# Altium PCB ADS1274.PcbDoc (part 2 of 2)
Units mil, origin at the board's own origin, x right, y up, seen from the top; angles counter-clockwise.
Board outline 3553.34 x 2765.94 mil, 2 copper layers (Top Layer, Bottom Layer); 108 components, 70 nets, 358 pads, 1184 vias.
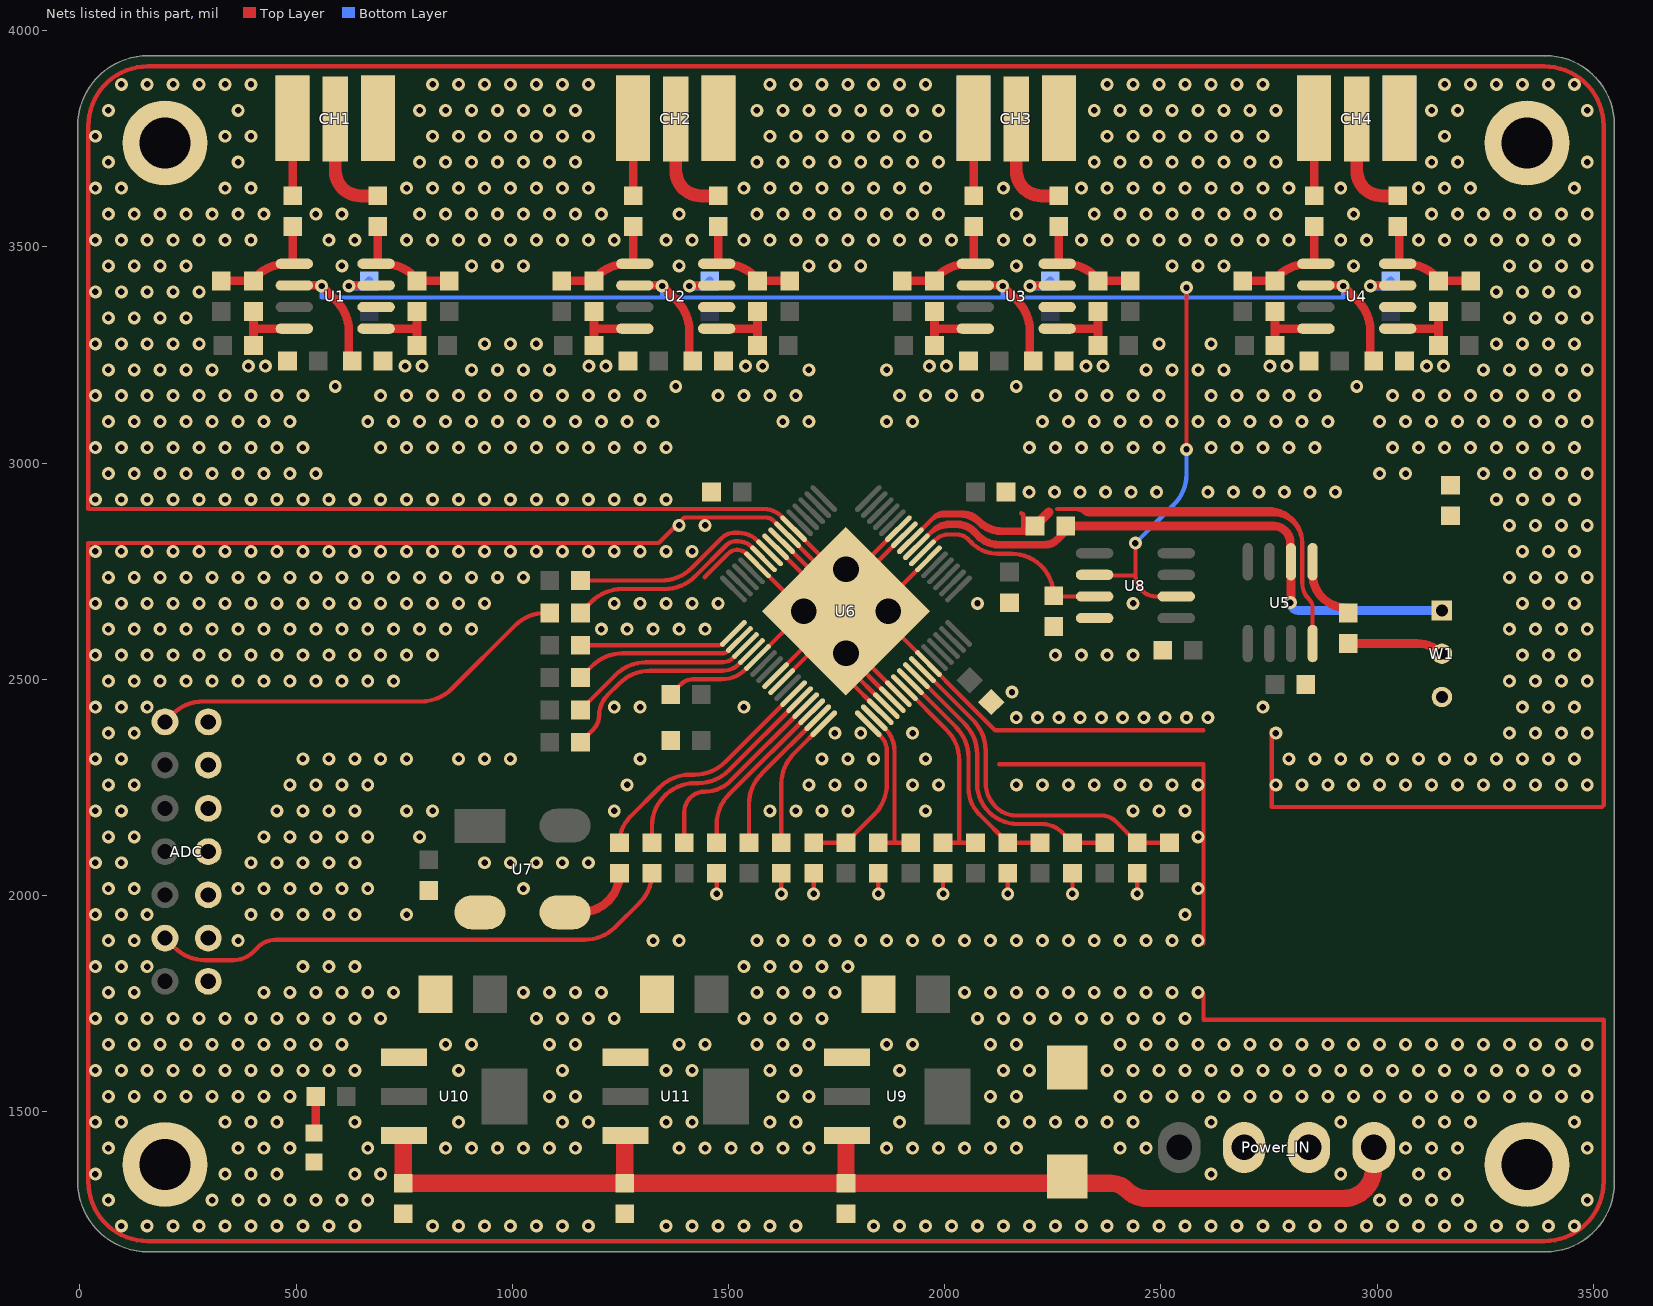
[diagram p2: the nets of this part, all layers, seen from the top]

## Via types
v1: diameter 30, hole 15, Top Layer to Bottom Layer, tented both sides, 1175 vias
v2: diameter 50, hole 28, Top Layer to Bottom Layer, tented both sides, 9 vias

## Nets (pads, with @x,y where several pads share a name; then routed paths per layer and width w, separated by ;. In a path a pad name is that pad's centre, name@x,y a point inside that pad or via, vN(x,y) a via of type N, cw(c..) or ccw(c..) an arc to the next point about the centre after c; other vN are vias at no path point) (continued)
GND: ADC.2 ADC.4 ADC.6 ADC.8 ADC.10 ADC.12 ADC.14 C12.1 C13.1 C14.1 C15.1 C16.2 C17.2 C18.2 C19.2 C20.1 C21.1 C22.1 C23.1 C24.1 C25.1 C26.1 C27.1 C28.1 C29.1 C30.1 C31.1 C32.1 C33.1 C34.1 C35.1 CH1.2 CH2.2 CH3.2 CH4.2 pad.0 pad.1 pad.2 pad.3 pad.4 Power.2 Power_IN.2 Power_IN.3 R3.1 R10.1 R17.1 R24.1 R39.2 R41.2 R42.2 R44.2 R45.1 R46.1 R47.1 R48.1 R53.1 U1.6 U2.6 U3.6 U4.6 U6.6 U6.7 U6.8 U6.9 U6.12 U6.21 U6.24 U6.25 U6.35 U6.36 U6.37 U6.38 U6.43 U6.54 U6.58 U6.59 U6.65 U7.2 U8.4 U9.1 U10.1 U11.1 | length 22861.8
  Top Layer w10: C20.1@1366.14,2464.57 1390.44,2488.86 cw(c1417.32,2461.98) 1417.32,2500 1484.25,2500 ccw(c1484.25,2578.43) 1539.71,2522.97 U6.21@1567.04,2550.3 pad.0@1674.22,2657.48 U6.12@1567.04,2764.66 1541.54,2790.16 ccw(c1519.68,2768.31) 1519.68,2799.21 ccw(c1519.68,2770.7) 1499.52,2790.86 1444.88,2736.22 ; v1(1472.44,2003.94) R44.2@1472.44,2051.18 ; U6.24@1608.8,2508.54 1757.73,2657.48 U6.9@1608.8,2806.42 ; v1(1622.05,2003.94) R42.2@1622.05,2051.18 ; U6.25@1622.72,2494.62 U6.65@1771.65,2643.56 ; U6.8@1622.72,2820.34 U6.65@1771.65,2671.4 ; v1(1696.85,2003.94) R41.2@1696.85,2051.18 ; U6.65@1771.65,2504.37 U6.35@1850.99,2425.03 ; pad.0@1771.65,2532.21 U6.36@1864.91,2438.95 ; pad.0@1771.65,2560.04 U6.37@1878.83,2452.86 ; pad.0@1771.65,2587.88 U6.38@1892.75,2466.78 ; v1(1846.46,2003.94) R39.2@1846.46,2051.18 ; U6.59@1892.75,2848.18 pad.0@1771.65,2727.08 ; U6.58@1906.67,2834.26 U6.65@1771.65,2699.24 ; U6.54@1962.35,2778.58 pad.0@1841.25,2657.48 ; v1(1996.06,2003.94) R53.1@1996.06,2051.18 ; 2041.82,2456.91 U6.43@1962.35,2536.38 pad.0@1841.25,2657.48 ; 2041.83,2456.9 2116.84,2381.89 2598.43,2381.89 ; C23.1@2101.69,2444.88 ccw(c2101.69,2453.43) C23.1@2107.73,2447.39 ; 2125.98,2303.15 2598.43,2303.15 v1@2598.43,1889.76 ; v1(2145.67,2003.94) R48.1@2145.67,2051.18 ; v1(2295.28,2003.94) R47.1@2295.28,2051.18 ; v1(2444.88,2003.94) R46.1@2444.88,2051.18 ; v1@2598.43,1771.65 2598.43,1712.6 3523.62,1712.6 3523.62,1338.58 cw(c3385.83,1338.58) 3385.83,1200.79 157.48,1200.79 cw(c157.48,1338.58) 19.68,1338.58 19.69,2814.96 1338.58,2814.96 1397.64,2874.02 1586.61,2874.02 cw(c1586.61,2849.24) 1604.13,2866.76 U6.7@1636.64,2834.26 U6.65@1771.65,2699.24 ; v1@2755.91,2381.89 2755.91,2204.72 3519.68,2204.72 3523.62,2208.66 3523.62,3779.53 ccw(c3385.83,3779.53) 3385.83,3917.32 157.48,3917.32 ccw(c157.48,3779.53) 19.69,3779.53 19.69,2893.7 1515.75,2893.7 1582.68,2893.7 cw(c1582.68,2839.74) 1620.84,2877.89 U6.6@1650.55,2848.18 pad.0@1771.65,2727.08 ; U6.65@1771.65,2671.4 U6.65@1771.65,2699.24 ; U6.65@1771.65,2671.4 U6.65@1771.65,2657.48 pad.0@1841.25,2657.48 ; U6.65@1771.65,2699.24 pad.0@1771.65,2727.08
  Top Layer w20: R3.1@492.13,3618.11 CH1.2@492.13,3797.24 ; R10.1@1279.53,3618.11 CH2.2@1279.53,3797.24 ; R17.1@2066.93,3618.11 CH3.2@2066.93,3797.24 ; R24.1@2854.33,3618.11 CH4.2@2854.33,3797.24
  other v1: 95.75,1235.75 155.75,1235.75 215.75,1235.75 275.75,1235.75 335.75,1235.75 395.75,1235.75 455.75,1235.75 515.75,1235.75 575.75,1235.75 635.75,1235.75 815.75,1235.75 875.75,1235.75 935.75,1235.75 995.75,1235.75 1055.75,1235.75 1115.75,1235.75 1175.75,1235.75 1355.75,1235.75 1415.75,1235.75 1475.75,1235.75 1535.75,1235.75 1595.75,1235.75 1655.75,1235.75 1835.75,1235.75 1895.75,1235.75 1955.75,1235.75 2015.75,1235.75 2075.75,1235.75 2135.75,1235.75 2195.75,1235.75 2255.75,1235.75 2315.75,1235.75 2375.75,1235.75 2435.75,1235.75 2495.75,1235.75 2555.75,1235.75 2615.75,1235.75 2675.75,1235.75 2735.75,1235.75 2795.75,1235.75 2855.75,1235.75 2915.75,1235.75 2975.75,1235.75 3035.75,1235.75 3095.75,1235.75 3155.75,1235.75 3215.75,1235.75 3275.75,1235.75 3335.75,1235.75 3395.75,1235.75 3455.75,1235.75 65.75,1295.75 305.75,1295.75 365.75,1295.75 425.75,1295.75 485.75,1295.75 545.75,1295.75 605.75,1295.75 665.75,1295.75 3005.75,1295.75 3065.75,1295.75 3125.75,1295.75 3185.75,1295.75 3485.75,1295.75 35.75,1355.75 335.75,1355.75 395.75,1355.75 455.75,1355.75 635.75,1355.75 695.75,1355.75 2615.75,1355.75 2915.75,1355.75 3095.75,1355.75 3155.75,1355.75 65.75,1415.75 365.75,1415.75 425.75,1415.75 485.75,1415.75 665.75,1415.75 845.75,1415.75 905.75,1415.75 965.75,1415.75 1025.75,1415.75 1085.75,1415.75 1145.75,1415.75 1385.75,1415.75 1445.75,1415.75 1505.75,1415.75 1565.75,1415.75 1625.75,1415.75 1685.75,1415.75 1865.75,1415.75 1925.75,1415.75 1985.75,1415.75 2045.75,1415.75 2105.75,1415.75 2165.75,1415.75 2405.75,1415.75 2465.75,1415.75 3065.75,1415.75 3125.75,1415.75 3185.75,1415.75 3485.75,1415.75 35.75,1475.75 95.75,1475.75 335.75,1475.75 395.75,1475.75 455.75,1475.75 635.75,1475.75 875.75,1475.75 1115.75,1475.75 1175.75,1475.75 1355.75,1475.75 1415.75,1475.75 1595.75,1475.75 1655.75,1475.75 1895.75,1475.75 2135.75,1475.75 2195.75,1475.75 2255.75,1475.75 2315.75,1475.75 2375.75,1475.75 2435.75,1475.75 2615.75,1475.75 2915.75,1475.75 3095.75,1475.75 3155.75,1475.75 3215.75,1475.75 3455.75,1475.75 65.75,1535.75 125.75,1535.75 185.75,1535.75 245.75,1535.75 305.75,1535.75 365.75,1535.75 425.75,1535.75 485.75,1535.75 1085.75,1535.75 1145.75,1535.75 1625.75,1535.75 1685.75,1535.75 2105.75,1535.75 2165.75,1535.75 2405.75,1535.75 2465.75,1535.75 2525.75,1535.75 2585.75,1535.75 2645.75,1535.75 2705.75,1535.75 2765.75,1535.75 2825.75,1535.75 2885.75,1535.75 2945.75,1535.75 3005.75,1535.75 3065.75,1535.75 3125.75,1535.75 3185.75,1535.75 3245.75,1535.75 3305.75,1535.75 3365.75,1535.75 3425.75,1535.75 3485.75,1535.75 35.75,1595.75 95.75,1595.75 155.75,1595.75 215.75,1595.75 275.75,1595.75 335.75,1595.75 395.75,1595.75 455.75,1595.75 515.75,1595.75 575.75,1595.75 635.75,1595.75 875.75,1595.75 1115.75,1595.75 1355.75,1595.75 1415.75,1595.75 1595.75,1595.75 1655.75,1595.75 1895.75,1595.75 2135.75,1595.75 2195.75,1595.75 2375.75,1595.75 2435.75,1595.75 2495.75,1595.75 2555.75,1595.75 2615.75,1595.75 2675.75,1595.75 2735.75,1595.75 2795.75,1595.75 2855.75,1595.75 2915.75,1595.75 2975.75,1595.75 3035.75,1595.75 3095.75,1595.75 3155.75,1595.75 3215.75,1595.75 3275.75,1595.75 3335.75,1595.75 3395.75,1595.75 3455.75,1595.75 65.75,1655.75 125.75,1655.75 185.75,1655.75 245.75,1655.75 305.75,1655.75 365.75,1655.75 425.75,1655.75 485.75,1655.75 545.75,1655.75 605.75,1655.75 845.75,1655.75 905.75,1655.75 1085.75,1655.75 1145.75,1655.75 1385.75,1655.75 1445.75,1655.75 1565.75,1655.75 1625.75,1655.75 1685.75,1655.75 1865.75,1655.75 1925.75,1655.75 2105.75,1655.75 2165.75,1655.75 2405.75,1655.75 2465.75,1655.75 2525.75,1655.75 2585.75,1655.75 2645.75,1655.75 2705.75,1655.75 2765.75,1655.75 2825.75,1655.75 2885.75,1655.75 2945.75,1655.75 3005.75,1655.75 3065.75,1655.75 3125.75,1655.75 3185.75,1655.75 3245.75,1655.75 3305.75,1655.75 3365.75,1655.75 3425.75,1655.75 3485.75,1655.75 35.75,1715.75 95.75,1715.75 155.75,1715.75 215.75,1715.75 275.75,1715.75 335.75,1715.75 395.75,1715.75 455.75,1715.75 515.75,1715.75 575.75,1715.75 635.75,1715.75 695.75,1715.75 1055.75,1715.75 1115.75,1715.75 1175.75,1715.75 1235.75,1715.75 1535.75,1715.75 1595.75,1715.75 1655.75,1715.75 1715.75,1715.75 2075.75,1715.75 2135.75,1715.75 2195.75,1715.75 2255.75,1715.75 2315.75,1715.75 2375.75,1715.75 2435.75,1715.75 2495.75,1715.75 2555.75,1715.75 65.75,1775.75 125.75,1775.75 425.75,1775.75 485.75,1775.75 545.75,1775.75 605.75,1775.75 665.75,1775.75 725.75,1775.75 1025.75,1775.75 1085.75,1775.75 1145.75,1775.75 1205.75,1775.75 1565.75,1775.75 1625.75,1775.75 1685.75,1775.75 1745.75,1775.75 2045.75,1775.75 2105.75,1775.75 2165.75,1775.75 2225.75,1775.75 2285.75,1775.75 2345.75,1775.75 2405.75,1775.75 2465.75,1775.75 2525.75,1775.75 2585.75,1775.75 35.75,1835.75 95.75,1835.75 155.75,1835.75 515.75,1835.75 575.75,1835.75 635.75,1835.75 1535.75,1835.75 1595.75,1835.75 1655.75,1835.75 1715.75,1835.75 1775.75,1835.75 65.75,1895.75 125.75,1895.75 365.75,1895.75 1325.75,1895.75 1385.75,1895.75 1565.75,1895.75 1625.75,1895.75 1685.75,1895.75 1745.75,1895.75 1805.75,1895.75 1865.75,1895.75 1925.75,1895.75 1985.75,1895.75 2045.75,1895.75 2105.75,1895.75 2165.75,1895.75 2225.75,1895.75 2285.75,1895.75 2345.75,1895.75 2405.75,1895.75 2465.75,1895.75 2525.75,1895.75 2585.75,1895.75 35.75,1955.75 95.75,1955.75 155.75,1955.75 395.75,1955.75 455.75,1955.75 515.75,1955.75 575.75,1955.75 635.75,1955.75 755.75,1955.75 2555.75,1955.75 65.75,2015.75 125.75,2015.75 365.75,2015.75 425.75,2015.75 485.75,2015.75 545.75,2015.75 605.75,2015.75 665.75,2015.75 1025.75,2015.75 2585.75,2015.75 35.75,2075.75 95.75,2075.75 395.75,2075.75 455.75,2075.75 515.75,2075.75 575.75,2075.75 635.75,2075.75 935.75,2075.75 995.75,2075.75 1055.75,2075.75 1115.75,2075.75 1175.75,2075.75 65.75,2135.75 125.75,2135.75 425.75,2135.75 485.75,2135.75 545.75,2135.75 605.75,2135.75 665.75,2135.75 785.75,2135.75 2585.75,2135.75 35.75,2195.75 95.75,2195.75 455.75,2195.75 515.75,2195.75 575.75,2195.75 635.75,2195.75 755.75,2195.75 815.75,2195.75 1235.75,2195.75 1595.75,2195.75 1655.75,2195.75 1715.75,2195.75 1775.75,2195.75 1955.75,2195.75 2435.75,2195.75 2495.75,2195.75 2555.75,2195.75 65.75,2255.75 125.75,2255.75 485.75,2255.75 545.75,2255.75 605.75,2255.75 665.75,2255.75 1265.75,2255.75 1685.75,2255.75 1745.75,2255.75 1805.75,2255.75 1925.75,2255.75 1985.75,2255.75 2165.75,2255.75 2225.75,2255.75 2285.75,2255.75 2345.75,2255.75 2405.75,2255.75 2465.75,2255.75 2525.75,2255.75 2585.75,2255.75 2765.75,2255.75 2825.75,2255.75 2885.75,2255.75 2945.75,2255.75 3005.75,2255.75 3065.75,2255.75 3125.75,2255.75 3185.75,2255.75 3245.75,2255.75 3305.75,2255.75 3365.75,2255.75 3425.75,2255.75 3485.75,2255.75 35.75,2315.75 95.75,2315.75 515.75,2315.75 575.75,2315.75 635.75,2315.75 695.75,2315.75 755.75,2315.75 875.75,2315.75 935.75,2315.75 995.75,2315.75 1295.75,2315.75 1715.75,2315.75 1775.75,2315.75 1835.75,2315.75 1955.75,2315.75 2795.75,2315.75 2855.75,2315.75 2915.75,2315.75 2975.75,2315.75 3035.75,2315.75 3095.75,2315.75 3155.75,2315.75 3215.75,2315.75 3275.75,2315.75 3335.75,2315.75 3395.75,2315.75 3455.75,2315.75 65.75,2375.75 125.75,2375.75 1745.75,2375.75 1805.75,2375.75 1925.75,2375.75 2765.75,2375.75 3305.75,2375.75 3365.75,2375.75 3425.75,2375.75 3485.75,2375.75 2165.35,2411.42 2214.57,2411.42 2263.78,2411.42 2312.99,2411.42 2362.2,2411.42 2411.42,2411.42 2460.63,2411.42 2509.84,2411.42 2559.06,2411.42 2608.27,2411.42 35.75,2435.75 95.75,2435.75 155.75,2435.75 1235.75,2435.75 1295.75,2435.75 1535.75,2435.75 2735.75,2435.75 3335.75,2435.75 3395.75,2435.75 3455.75,2435.75 2155.51,2470.47 65.75,2495.75 125.75,2495.75 185.75,2495.75 245.75,2495.75 305.75,2495.75 365.75,2495.75 425.75,2495.75 485.75,2495.75 545.75,2495.75 605.75,2495.75 665.75,2495.75 725.75,2495.75 3305.75,2495.75 3365.75,2495.75 3425.75,2495.75 3485.75,2495.75 35.75,2555.75 95.75,2555.75 155.75,2555.75 215.75,2555.75 275.75,2555.75 335.75,2555.75 395.75,2555.75 455.75,2555.75 515.75,2555.75 575.75,2555.75 635.75,2555.75 695.75,2555.75 755.75,2555.75 815.75,2555.75 2255.75,2555.75 2315.75,2555.75 2375.75,2555.75 2435.75,2555.75 3335.75,2555.75 3395.75,2555.75 3455.75,2555.75 65.75,2615.75 125.75,2615.75 185.75,2615.75 245.75,2615.75 305.75,2615.75 365.75,2615.75 425.75,2615.75 485.75,2615.75 545.75,2615.75 605.75,2615.75 665.75,2615.75 725.75,2615.75 785.75,2615.75 845.75,2615.75 905.75,2615.75 1205.75,2615.75 1265.75,2615.75 1325.75,2615.75 1385.75,2615.75 1445.75,2615.75 3305.75,2615.75 3365.75,2615.75 3425.75,2615.75 3485.75,2615.75 35.75,2675.75 95.75,2675.75 155.75,2675.75 215.75,2675.75 275.75,2675.75 335.75,2675.75 395.75,2675.75 455.75,2675.75 515.75,2675.75 575.75,2675.75 635.75,2675.75 695.75,2675.75 755.75,2675.75 815.75,2675.75 875.75,2675.75 935.75,2675.75 1235.75,2675.75 1295.75,2675.75 1355.75,2675.75 1415.75,2675.75 1475.75,2675.75 2075.75,2675.75 2435.75,2675.75 3335.75,2675.75 3395.75,2675.75 3455.75,2675.75 65.75,2735.75 125.75,2735.75 185.75,2735.75 245.75,2735.75 305.75,2735.75 365.75,2735.75 425.75,2735.75 485.75,2735.75 545.75,2735.75 605.75,2735.75 665.75,2735.75 725.75,2735.75 785.75,2735.75 845.75,2735.75 905.75,2735.75 965.75,2735.75 1025.75,2735.75 3305.75,2735.75 3365.75,2735.75 3425.75,2735.75 3485.75,2735.75 35.75,2795.75 95.75,2795.75 155.75,2795.75 215.75,2795.75 275.75,2795.75 335.75,2795.75 395.75,2795.75 455.75,2795.75 515.75,2795.75 575.75,2795.75 635.75,2795.75 695.75,2795.75 755.75,2795.75 815.75,2795.75 875.75,2795.75 935.75,2795.75 995.75,2795.75 1055.75,2795.75 1115.75,2795.75 1175.75,2795.75 1235.75,2795.75 1295.75,2795.75 1355.75,2795.75 1415.75,2795.75 3335.75,2795.75 3395.75,2795.75 3455.75,2795.75 1385.75,2855.75 1445.75,2855.75 3305.75,2855.75 3365.75,2855.75 3425.75,2855.75 3485.75,2855.75 35.75,2915.75 95.75,2915.75 155.75,2915.75 215.75,2915.75 275.75,2915.75 335.75,2915.75 395.75,2915.75 455.75,2915.75 515.75,2915.75 575.75,2915.75 635.75,2915.75 695.75,2915.75 755.75,2915.75 815.75,2915.75 875.75,2915.75 935.75,2915.75 995.75,2915.75 1055.75,2915.75 1115.75,2915.75 1175.75,2915.75 1235.75,2915.75 1295.75,2915.75 1355.75,2915.75 3275.75,2915.75 3335.75,2915.75 3395.75,2915.75 3455.75,2915.75 2194.88,2933.07 2253.94,2933.07 2312.99,2933.07 2372.05,2933.07 2431.1,2933.07 2490.16,2933.07 2608.27,2933.07 2667.32,2933.07 2726.38,2933.07 2785.43,2933.07 2844.49,2933.07 2903.54,2933.07 65.75,2975.75 125.75,2975.75 185.75,2975.75 245.75,2975.75 305.75,2975.75 365.75,2975.75 425.75,2975.75 485.75,2975.75 545.75,2975.75 3005.75,2975.75 3065.75,2975.75 3245.75,2975.75 3305.75,2975.75 3365.75,2975.75 3425.75,2975.75 3485.75,2975.75 35.75,3035.75 95.75,3035.75 155.75,3035.75 215.75,3035.75 275.75,3035.75 335.75,3035.75 395.75,3035.75 455.75,3035.75 515.75,3035.75 695.75,3035.75 755.75,3035.75 815.75,3035.75 875.75,3035.75 935.75,3035.75 995.75,3035.75 1055.75,3035.75 1115.75,3035.75 1175.75,3035.75 1235.75,3035.75 1295.75,3035.75 1355.75,3035.75 2195.75,3035.75 2255.75,3035.75 2315.75,3035.75 2375.75,3035.75 2435.75,3035.75 2495.75,3035.75 2615.75,3035.75 2675.75,3035.75 2735.75,3035.75 2795.75,3035.75 2855.75,3035.75 3035.75,3035.75 3095.75,3035.75 3155.75,3035.75 3215.75,3035.75 3275.75,3035.75 3335.75,3035.75 3395.75,3035.75 3455.75,3035.75 65.75,3095.75 125.75,3095.75 185.75,3095.75 245.75,3095.75 305.75,3095.75 365.75,3095.75 425.75,3095.75 485.75,3095.75 665.75,3095.75 725.75,3095.75 785.75,3095.75 845.75,3095.75 905.75,3095.75 965.75,3095.75 1025.75,3095.75 1085.75,3095.75 1145.75,3095.75 1205.75,3095.75 1265.75,3095.75 1325.75,3095.75 1625.75,3095.75 1685.75,3095.75 1865.75,3095.75 1925.75,3095.75 2225.75,3095.75 2285.75,3095.75 2345.75,3095.75 2405.75,3095.75 2465.75,3095.75 2525.75,3095.75 2585.75,3095.75 2645.75,3095.75 2705.75,3095.75 2765.75,3095.75 2825.75,3095.75 2885.75,3095.75 3005.75,3095.75 3065.75,3095.75 3125.75,3095.75 3185.75,3095.75 3245.75,3095.75 3305.75,3095.75 3365.75,3095.75 3425.75,3095.75 3485.75,3095.75 35.75,3155.75 95.75,3155.75 155.75,3155.75 215.75,3155.75 275.75,3155.75 335.75,3155.75 395.75,3155.75 455.75,3155.75 515.75,3155.75 695.75,3155.75 755.75,3155.75 815.75,3155.75 875.75,3155.75 935.75,3155.75 995.75,3155.75 1055.75,3155.75 1115.75,3155.75 1175.75,3155.75 1235.75,3155.75 1295.75,3155.75 1475.75,3155.75 1535.75,3155.75 1595.75,3155.75 1655.75,3155.75 1895.75,3155.75 1955.75,3155.75 2015.75,3155.75 2075.75,3155.75 2255.75,3155.75 2315.75,3155.75 2375.75,3155.75 2435.75,3155.75 2495.75,3155.75 2615.75,3155.75 2675.75,3155.75 2735.75,3155.75 2795.75,3155.75 2855.75,3155.75 3035.75,3155.75 3095.75,3155.75 3155.75,3155.75 3215.75,3155.75 3275.75,3155.75 3335.75,3155.75 3395.75,3155.75 3455.75,3155.75 590.55,3177.17 1377.95,3177.17 2165.35,3177.17 2952.76,3177.17 65.75,3215.75 125.75,3215.75 185.75,3215.75 245.75,3215.75 305.75,3215.75 905.75,3215.75 965.75,3215.75 1025.75,3215.75 1085.75,3215.75 1685.75,3215.75 1865.75,3215.75 2465.75,3215.75 2525.75,3215.75 2585.75,3215.75 2645.75,3215.75 3245.75,3215.75 3305.75,3215.75 3365.75,3215.75 3425.75,3215.75 3485.75,3215.75 389.76,3224.41 429.13,3224.41 751.97,3224.41 791.34,3224.41 1177.17,3224.41 1216.54,3224.41 1539.37,3224.41 1578.74,3224.41 1964.57,3224.41 2003.94,3224.41 2326.77,3224.41 2366.14,3224.41 2751.96,3224.4 2791.33,3224.4 3114.16,3224.4 3153.53,3224.4 35.75,3275.75 95.75,3275.75 155.75,3275.75 215.75,3275.75 275.75,3275.75 935.75,3275.75 995.75,3275.75 1055.75,3275.75 2495.75,3275.75 2615.75,3275.75 3275.75,3275.75 3335.75,3275.75 3395.75,3275.75 3455.75,3275.75 65.75,3335.75 125.75,3335.75 185.75,3335.75 245.75,3335.75 3305.75,3335.75 3365.75,3335.75 3425.75,3335.75 3485.75,3335.75 35.75,3395.75 95.75,3395.75 155.75,3395.75 215.75,3395.75 275.75,3395.75 3275.75,3395.75 3335.75,3395.75 3395.75,3395.75 3455.75,3395.75 65.75,3455.75 125.75,3455.75 185.75,3455.75 245.75,3455.75 605.75,3455.75 905.75,3455.75 965.75,3455.75 1025.75,3455.75 1385.75,3455.75 1685.75,3455.75 1745.75,3455.75 1805.75,3455.75 2165.75,3455.75 2525.75,3455.75 2585.75,3455.75 2645.75,3455.75 2945.75,3455.75 3305.75,3455.75 3365.75,3455.75 3425.75,3455.75 3485.75,3455.75 35.75,3515.75 95.75,3515.75 155.75,3515.75 215.75,3515.75 275.75,3515.75 335.75,3515.75 395.75,3515.75 575.75,3515.75 635.75,3515.75 755.75,3515.75 815.75,3515.75 875.75,3515.75 935.75,3515.75 995.75,3515.75 1055.75,3515.75 1115.75,3515.75 1175.75,3515.75 1235.75,3515.75 1355.75,3515.75 1415.75,3515.75 1535.75,3515.75 1595.75,3515.75 1655.75,3515.75 1715.75,3515.75 1775.75,3515.75 1835.75,3515.75 1895.75,3515.75 1955.75,3515.75 2015.75,3515.75 2135.75,3515.75 2195.75,3515.75 2315.75,3515.75 2375.75,3515.75 2435.75,3515.75 2495.75,3515.75 2555.75,3515.75 2615.75,3515.75 2675.75,3515.75 2735.75,3515.75 2795.75,3515.75 2915.75,3515.75 2975.75,3515.75 3095.75,3515.75 3155.75,3515.75 3215.75,3515.75 3275.75,3515.75 3335.75,3515.75 3395.75,3515.75 3455.75,3515.75 65.75,3575.75 125.75,3575.75 185.75,3575.75 245.75,3575.75 305.75,3575.75 365.75,3575.75 425.75,3575.75 545.75,3575.75 605.75,3575.75 785.75,3575.75 845.75,3575.75 905.75,3575.75 965.75,3575.75 1025.75,3575.75 1085.75,3575.75 1145.75,3575.75 1205.75,3575.75 1385.75,3575.75 1565.75,3575.75 1625.75,3575.75 1685.75,3575.75 1745.75,3575.75 1805.75,3575.75 1865.75,3575.75 1925.75,3575.75 1985.75,3575.75 2165.75,3575.75 2345.75,3575.75 2405.75,3575.75 2465.75,3575.75 2525.75,3575.75 2585.75,3575.75 2645.75,3575.75 2705.75,3575.75 2765.75,3575.75 2945.75,3575.75 3125.75,3575.75 3185.75,3575.75 3245.75,3575.75 3305.75,3575.75 3365.75,3575.75 3425.75,3575.75 3485.75,3575.75 35.75,3635.75 95.75,3635.75 335.75,3635.75 395.75,3635.75 755.75,3635.75 815.75,3635.75 875.75,3635.75 935.75,3635.75 995.75,3635.75 1055.75,3635.75 1115.75,3635.75 1175.75,3635.75 1535.75,3635.75 1595.75,3635.75 1655.75,3635.75 1715.75,3635.75 1775.75,3635.75 1835.75,3635.75 1895.75,3635.75 1955.75,3635.75 2135.75,3635.75 2315.75,3635.75 2375.75,3635.75 2435.75,3635.75 2495.75,3635.75 2555.75,3635.75 2615.75,3635.75 2675.75,3635.75 2735.75,3635.75 2795.75,3635.75 2915.75,3635.75 3095.75,3635.75 3155.75,3635.75 3215.75,3635.75 3455.75,3635.75 65.75,3695.75 365.75,3695.75 785.75,3695.75 845.75,3695.75 905.75,3695.75 965.75,3695.75 1025.75,3695.75 1085.75,3695.75 1145.75,3695.75 1565.75,3695.75 1625.75,3695.75 1685.75,3695.75 1745.75,3695.75 1805.75,3695.75 1865.75,3695.75 1925.75,3695.75 1985.75,3695.75 2345.75,3695.75 2405.75,3695.75 2465.75,3695.75 2525.75,3695.75 2585.75,3695.75 2645.75,3695.75 2705.75,3695.75 2765.75,3695.75 3125.75,3695.75 3185.75,3695.75 3485.75,3695.75 35.75,3755.75 335.75,3755.75 395.75,3755.75 815.75,3755.75 875.75,3755.75 935.75,3755.75 995.75,3755.75 1055.75,3755.75 1115.75,3755.75 1175.75,3755.75 1595.75,3755.75 1655.75,3755.75 1715.75,3755.75 1775.75,3755.75 1835.75,3755.75 1895.75,3755.75 1955.75,3755.75 2375.75,3755.75 2435.75,3755.75 2495.75,3755.75 2555.75,3755.75 2615.75,3755.75 2675.75,3755.75 2735.75,3755.75 3155.75,3755.75 65.75,3815.75 365.75,3815.75 785.75,3815.75 845.75,3815.75 905.75,3815.75 965.75,3815.75 1025.75,3815.75 1085.75,3815.75 1145.75,3815.75 1565.75,3815.75 1625.75,3815.75 1685.75,3815.75 1745.75,3815.75 1805.75,3815.75 1865.75,3815.75 1925.75,3815.75 1985.75,3815.75 2345.75,3815.75 2405.75,3815.75 2465.75,3815.75 2525.75,3815.75 2585.75,3815.75 2645.75,3815.75 2705.75,3815.75 2765.75,3815.75 3125.75,3815.75 3185.75,3815.75 3485.75,3815.75 95.75,3875.75 155.75,3875.75 215.75,3875.75 275.75,3875.75 335.75,3875.75 395.75,3875.75 815.75,3875.75 875.75,3875.75 935.75,3875.75 995.75,3875.75 1055.75,3875.75 1115.75,3875.75 1175.75,3875.75 1595.75,3875.75 1655.75,3875.75 1715.75,3875.75 1775.75,3875.75 1835.75,3875.75 1895.75,3875.75 1955.75,3875.75 2375.75,3875.75 2435.75,3875.75 2495.75,3875.75 2555.75,3875.75 2615.75,3875.75 2675.75,3875.75 2735.75,3875.75 3155.75,3875.75 3215.75,3875.75 3275.75,3875.75 3335.75,3875.75 3395.75,3875.75 3455.75,3875.75
MCLK: R54.2 U6.27 | length 553.8
  Top Layer w10: R54.2@1248.03,2122.05 cw(c1333.57,2122.05) 1273.09,2182.54 1340.79,2250.24 cw(c1411.5,2179.53) 1411.5,2279.53 1421.88,2279.53 ccw(c1421.88,2379.53) 1492.59,2308.82 U6.27@1650.55,2466.78
NetC1_1: C1.1 R1.2 R4.1 U1.8 | length 262.4
  Top Layer w20: U1.8@685.04,3460.83 702.48,3460.83 cw(c702.48,3360.83) 773.19,3431.54 C1.1@779.53,3425.2 ; U1.8@688.98,3464.57 R1.2@688.98,3547.24 ; C1.1@779.53,3421.26 R4.1@854.33,3421.26
NetC1_2: C1.2 R6.1 U1.5 | length 173.3
  Top Layer w20: U1.5@685.04,3310.83 779.33,3310.83 779.53,3311.02 ; R6.1@779.53,3271.65 779.53,3311.02 ; C1.2@779.53,3350.39 779.53,3311.02
NetC2_1: C2.1 R3.2 R5.1 U1.1 | length 253.5
  Top Layer w20: R5.1@326.77,3421.26 C2.1@401.57,3421.26 ; C2.1@407.92,3431.54 cw(c478.63,3360.83) 478.63,3460.83 U1.1@496.06,3460.83 ; U1.1@492.13,3464.57 R3.2@492.13,3547.24
NetC2_2: C2.2 R7.1 U1.4 | length 173.3
  Top Layer w20: R7.1@401.57,3271.65 401.57,3311.02 ; C2.2@401.57,3350.39 401.57,3311.02 ; U1.4@496.06,3310.83 401.77,3310.83 401.57,3311.02
NetC3_1: C3.1 R8.2 R11.1 U2.8 | length 262.4
  Top Layer w20: U2.8@1472.44,3460.83 1489.88,3460.83 cw(c1489.88,3360.83) 1560.59,3431.54 C3.1@1566.93,3425.2 ; U2.8@1476.38,3464.57 R8.2@1476.38,3547.24 ; C3.1@1566.93,3421.26 R11.1@1641.73,3421.26
NetC3_2: C3.2 R13.1 U2.5 | length 173.3
  Top Layer w20: U2.5@1472.44,3310.83 1566.73,3310.83 1566.93,3311.02 ; R13.1@1566.93,3271.65 1566.93,3311.02 ; C3.2@1566.93,3350.39 1566.93,3311.02
NetC4_1: C4.1 R10.2 R12.1 U2.1 | length 253.5
  Top Layer w20: R12.1@1114.17,3421.26 C4.1@1188.98,3421.26 ; C4.1@1195.32,3431.54 cw(c1266.03,3360.83) 1266.03,3460.83 U2.1@1283.46,3460.83 ; U2.1@1279.53,3464.57 R10.2@1279.53,3547.24
NetC4_2: C4.2 R14.1 U2.4 | length 173.3
  Top Layer w20: R14.1@1188.98,3271.65 1188.98,3311.02 ; C4.2@1188.98,3350.39 1188.98,3311.02 ; U2.4@1283.46,3310.83 1189.17,3310.83 1188.98,3311.02
NetC5_1: C5.1 R15.2 R18.1 U3.8 | length 262.4
  Top Layer w20: U3.8@2259.84,3460.83 2277.28,3460.83 cw(c2277.28,3360.83) 2347.99,3431.54 C5.1@2354.33,3425.2 ; U3.8@2263.78,3464.57 R15.2@2263.78,3547.24 ; C5.1@2354.33,3421.26 R18.1@2429.13,3421.26
NetC5_2: C5.2 R20.1 U3.5 | length 173.3
  Top Layer w20: U3.5@2259.84,3310.83 2354.13,3310.83 2354.33,3311.02 ; R20.1@2354.33,3271.65 2354.33,3311.02 ; C5.2@2354.33,3350.39 2354.33,3311.02
NetC6_1: C6.1 R17.2 R19.1 U3.1 | length 253.5
  Top Layer w20: R19.1@1901.57,3421.26 C6.1@1976.38,3421.26 ; C6.1@1982.72,3431.54 cw(c2053.43,3360.83) 2053.43,3460.83 U3.1@2070.87,3460.83 ; U3.1@2066.93,3464.57 R17.2@2066.93,3547.24
NetC6_2: C6.2 R21.1 U3.4 | length 173.3
  Top Layer w20: R21.1@1976.38,3271.65 1976.38,3311.02 ; C6.2@1976.38,3350.39 1976.38,3311.02 ; U3.4@2070.87,3310.83 1976.58,3310.83 1976.38,3311.02
NetC7_1: C7.1 R22.2 R25.1 U4.8 | length 262.4
  Top Layer w20: U4.8@3047.24,3460.83 3064.68,3460.83 cw(c3064.68,3360.83) 3135.39,3431.54 C7.1@3141.73,3425.2 ; U4.8@3051.18,3464.57 R22.2@3051.18,3547.24 ; C7.1@3141.73,3421.26 R25.1@3216.54,3421.26
NetC7_2: C7.2 R27.1 U4.5 | length 173.3
  Top Layer w20: U4.5@3047.24,3310.83 3141.54,3310.83 3141.73,3311.02 ; R27.1@3141.73,3271.65 3141.73,3311.02 ; C7.2@3141.73,3350.39 3141.73,3311.02
NetC8_1: C8.1 R24.2 R26.1 U4.1 | length 253.5
  Top Layer w20: R26.1@2688.98,3421.26 C8.1@2763.78,3421.26 ; C8.1@2770.12,3431.54 cw(c2840.83,3360.83) 2840.83,3460.83 U4.1@2858.27,3460.83 ; U4.1@2854.33,3464.57 R24.2@2854.33,3547.24
NetC8_2: C8.2 R28.1 U4.4 | length 173.3
  Top Layer w20: R28.1@2763.78,3271.65 2763.78,3311.02 ; C8.2@2763.78,3350.39 2763.78,3311.02 ; U4.4@2858.27,3310.83 2763.98,3310.83 2763.78,3311.02
NetCH1_1: CH1.1 R1.1 | length 250.2
  Top Layer w30: CH1.1@590.55,3795.28 590.55,3677.17 ccw(c649.61,3677.17) 649.61,3618.11 R1.1@688.98,3618.11
NetCH2_1: CH2.1 R8.1 | length 250.2
  Top Layer w30: CH2.1@1377.95,3795.28 1377.95,3677.17 ccw(c1437.01,3677.17) 1437.01,3618.11 R8.1@1476.38,3618.11
NetCH3_1: CH3.1 R15.1 | length 250.2
  Top Layer w30: CH3.1@2165.35,3795.28 2165.35,3677.17 ccw(c2224.41,3677.17) 2224.41,3618.11 R15.1@2263.78,3618.11
NetCH4_1: CH4.1 R22.1 | length 250.2
  Top Layer w30: CH4.1@2952.76,3795.28 2952.76,3677.17 ccw(c3011.81,3677.17) 3011.81,3618.11 R22.1@3051.18,3618.11
NetPower_1: Power.1 R55.1 | length 84.6
  Top Layer w20: Power.1@545.28,1450.79 R55.1@545.28,1535.43
NetR2_2: R2.2 U1.7 | length 115.7
  Top Layer w20: v1(622.05,3409.45) 623.43,3410.83 U1.7@685.04,3410.83
  Bottom Layer w20: v1(622.05,3409.45) 657.48,3409.45 R2.2@669.29,3421.26
NetR9_2: R9.2 U2.7 | length 115.7
  Top Layer w20: v1(1409.45,3409.45) 1410.83,3410.83 U2.7@1472.44,3410.83
  Bottom Layer w20: v1(1409.45,3409.45) 1444.88,3409.45 R9.2@1456.69,3421.26
NetR16_2: R16.2 U3.7 | length 115.7
  Top Layer w20: v1(2196.85,3409.45) 2198.23,3410.83 U3.7@2259.84,3410.83
  Bottom Layer w20: v1(2196.85,3409.45) 2232.28,3409.45 R16.2@2244.09,3421.26
NetR23_2: R23.2 U4.7 | length 115.7
  Top Layer w20: v1(2984.25,3409.45) 2985.63,3410.83 U4.7@3047.24,3410.83
  Bottom Layer w20: v1(2984.25,3409.45) 3019.69,3409.45 R23.2@3031.5,3421.26
NetR29_2: R29.2 U6.20 | length 498.2
  Top Layer w10: R29.2@1157.48,2354.33 1187.56,2384.41 ccw(c1155.64,2416.34) 1200.79,2416.34 cw(c1267.32,2416.34) 1220.27,2463.38 1247.29,2490.4 cw(c1318,2419.68) 1318,2519.68 1486.22,2519.68 ccw(c1486.22,2573.67) 1524.4,2535.5 U6.20@1553.12,2564.22
NetR30_2: R30.2 U6.19 | length 437.7
  Top Layer w10: R30.2@1157.48,2429.13 1238.43,2510.08 cw(c1309.14,2439.37) 1309.14,2539.37 1486.22,2539.37 ccw(c1486.22,2573.67) 1510.48,2549.42 U6.19@1539.2,2578.14
NetR31_2: R31.2 U6.18 | length 399.3
  Top Layer w10: R31.2@1157.48,2503.94 1184.29,2530.75 cw(c1255,2460.04) 1255,2560.04 1486.22,2560.04 ccw(c1486.22,2577.03) 1498.24,2565.02 U6.18@1525.28,2592.06
NetR32_2: R32.2 U6.17 | length 364.4
  Top Layer w10: R32.2@1157.48,2578.74 1476.38,2578.74 ccw(c1476.38,2597.44) 1489.6,2584.22 U6.17@1511.36,2605.98
NetR33_1: R33.1 U5.5 | length 151.1
  Top Layer w20: U5.5@2850.59,2771.65 2850.59,2743.9 ccw(c2929.13,2743.9) R33.1@2929.13,2665.35
NetR33_2: R33.2 W1.2 | length 222.8
  Top Layer w20: R33.2@2933.07,2582.68 3092.58,2582.68 cw(c3092.58,2502.03) W1.2@3149.61,2559.06
NetR34_1: R34.1 U6.28 | length 512.2
  Top Layer w10: R34.1@1322.83,2122.05 1322.83,2159.84 cw(c1422.83,2159.84) 1422.83,2259.84 1430.03,2259.84 ccw(c1430.03,2359.84) 1500.74,2289.13 U6.28@1664.47,2452.86
NetR35_1: R35.1 U6.29 | length 457.3
  Top Layer w10: R35.1@1397.64,2122.05 1397.64,2192.91 cw(c1444.88,2192.91) 1444.88,2240.16 ccw(c1444.88,2323.99) 1504.16,2264.71 U6.29@1678.39,2438.95
NetR36_1: R36.1 U6.11 | length 497.2
  Top Layer w10: R36.1@1157.48,2653.54 1183.31,2679.37 cw(c1254.02,2608.66) 1254.02,2708.66 1352.04,2708.66 ccw(c1352.04,2808.66) 1422.75,2737.95 1495.94,2811.14 cw(c1514.66,2792.42) 1514.66,2818.9 1523.62,2818.9 cw(c1523.62,2777.81) 1552.67,2806.86 U6.11@1580.96,2778.58
NetR37_1: R37.1 U6.10 | length 493.5
  Top Layer w10: R37.1@1157.48,2728.35 1344.41,2728.35 ccw(c1344.41,2828.35) 1415.12,2757.64 1484.25,2826.77 cw(c1512.77,2798.26) 1512.77,2838.58 1523.62,2838.58 cw(c1523.62,2777.82) 1566.59,2820.78 U6.10@1594.88,2792.5
NetR38_1: R38.1 R39.1 U6.34 | length 344.4
  Top Layer w10: R39.1@1846.46,2122.05 1883.86,2122.05 ; U6.34@1862.2,2385.83 cw(c1809.93,2333.55) 1883.86,2333.55 1883.86,2122.05 ; R38.1@1921.26,2122.05 1883.86,2122.05
NetR40_1: R40.1 R41.1 U6.33 | length 400.6
  Top Layer w10: R41.1@1696.85,2122.05 R40.1@1771.65,2122.05 1836.85,2187.25 ccw(c1766.14,2257.96) 1866.14,2257.96 1866.14,2334.65 ccw(c1818.93,2334.65) 1852.31,2368.03 U6.33@1823.16,2397.19
NetR42_1: R42.1 U6.32 | length 311.5
  Top Layer w10: R42.1@1622.05,2122.05 1622.05,2257.66 cw(c1722.05,2257.66) 1651.34,2328.37 U6.32@1720.15,2397.19
NetR43_1: R43.1 U6.31 | length 350.6
  Top Layer w10: R43.1@1547.24,2122.05 1547.24,2210.7 cw(c1647.24,2210.7) 1576.53,2281.41 U6.31@1706.23,2411.11
NetR44_1: R44.1 U6.30 | length 389.7
  Top Layer w10: R44.1@1472.44,2122.05 1472.44,2163.73 cw(c1572.44,2163.73) 1501.73,2234.44 U6.30@1692.31,2425.03
NetR46_2: R46.2 R49.1 U6.42 | length 811.1
  Top Layer w10: U6.42@1948.43,2522.46 2065.2,2405.69 cw(c1994.49,2334.98) 2094.49,2334.98 2094.49,2261.75 ccw(c2175.14,2261.75) 2118.11,2204.72 ccw(c2165.63,2252.25) 2165.63,2185.04 2362.2,2185.04 cw(c2362.2,2137.52) 2395.8,2171.13 ; 2395.81,2171.12 R46.2@2444.88,2122.05 R49.1@2519.69,2122.05
NetR47_2: R47.2 R50.1 U6.41 | length 667
  Top Layer w10: U6.41@1934.51,2508.54 2045.51,2397.54 cw(c1974.8,2326.83) 2074.8,2326.83 2074.8,2259.45 ccw(c2168.9,2259.45) 2102.36,2192.91 ccw(c2168.9,2259.45) 2168.9,2165.35 2224.41,2165.35 cw(c2224.41,2098.82) 2271.46,2145.87 R47.2@2295.28,2122.05 R50.1@2370.08,2122.05
NetR48_2: R48.2 R51.1 U6.40 | length 532.6
  Top Layer w10: U6.40@1920.59,2494.62 2025.83,2389.39 cw(c1955.12,2318.67) 2055.12,2318.67 2055.12,2248.03 ccw(c2140.66,2248.03) 2080.17,2187.54 R48.2@2145.67,2122.05 R51.1@2220.47,2122.05
NetR52_1: R52.1 R53.2 U6.39 | length 481.7
  Top Layer w10: U6.39@1906.67,2480.7 2004.18,2383.2 cw(c1933.46,2312.49) 2033.46,2312.49 2033.46,2122.05 ; R53.2@1996.06,2122.05 2033.46,2122.05 ; R52.1@2070.87,2122.05 2033.46,2122.05
NetR54_1: R54.1 U7.3 | length 177.4
  Top Layer w20: U7.3@1122.05,1961.02 1157.87,1961.02 ccw(c1157.87,2051.18) R54.1@1248.03,2051.18
POWER_IN: C13.2 C14.2 C15.2 C19.1 Power_IN.1 U9.3 U10.3 U11.3 | length 2677.9
  Top Layer w40: U10.3@750,1444.88 748.03,1444.88 C15.2@748.03,1334.65 C14.2@1259.84,1334.65 ; U11.3@1261.81,1444.88 1259.84,1444.88 C14.2@1259.84,1334.65 ; U9.3@1773.62,1444.88 1771.65,1444.88 C13.2@1771.65,1334.65 ; Power_IN.1@2992.13,1417.32 2992.13,1370.08 cw(c2921.26,1370.08) 2921.26,1299.21 2468.78,1299.21 cw(c2468.78,1366.42) 2421.26,1318.9 ccw(c2383.24,1280.88) 2383.24,1334.65 C13.2@1771.65,1334.65 ; C14.2@1259.84,1334.65 C13.2@1771.65,1334.65
RGND: C9.1 C10.1 R45.2 U5.4 U6.57 W1.3 | length 2512.2
  Top Layer w10: U6.57@1920.59,2820.34 1968.6,2868.35 ; 2177.01,2883.64 ccw(c2181.24,2887.87) 2181.24,2881.89 2181.24,2855.63 ccw(c2194.22,2855.63) 2185.04,2846.46 ; C10.1@2192.91,2846.46 2185.04,2846.46 ; C10.1@2200.79,2838.58 2129.1,2838.58 cw(c2129.1,2908.63) 2079.57,2859.1 ccw(c2032.35,2811.87) 2032.35,2878.66 1993.5,2878.66 ccw(c1993.5,2843.46) 1968.62,2868.36 ; 2260.12,2893.7 2303.83,2893.7 ; 2770.85,2880.98 ccw(c2763.69,2880.98) 2763.69,2888.13 2332.34,2888.13 ; U5.4@2850.59,2582.68 2850.59,2665.55 ccw(c2823.03,2665.55) 2842.52,2685.04 cw(c2880.54,2723.06) 2826.77,2723.06 2826.77,2814.96 ; 1968.62,2868.36 1976.24,2875.98 cw(c2000,2852.22) 2000,2885.83 2040.72,2885.83 cw(c2040.72,2832.06) 2078.74,2870.08 ccw(c2135.77,2927.11) 2135.77,2846.46 2185.04,2846.46 ; 2303.83,2893.7 cw(c2303.83,2866.82) 2322.83,2885.83 ccw(c2332.34,2895.33) 2332.34,2881.89 ; 2303.83,2893.7 2326.77,2893.7 ; 2326.77,2893.7 cw(c2326.77,2888.13) 2332.34,2888.13 ; 2326.77,2893.7 2748.03,2893.7 cw(c2748.03,2814.96) 2826.77,2814.96 ; 2332.34,2881.89 2332.34,2888.13 ; 2332.34,2881.89 2759.84,2881.89 cw(c2759.84,2814.96) 2826.77,2814.96
  Top Layer w22: C10.1@2208.66,2854.33 2240.32,2885.98
SCLK: ADC.11 R34.2 | length 1235.4
  Top Layer w10: ADC.11@196.85,1901.57 218.74,1879.68 ccw(c289.45,1950.39) 289.45,1850.39 354.05,1850.39 ccw(c354.05,1917.6) 401.57,1870.08 412.43,1880.93 cw(c452.76,1840.61) 452.76,1897.64 1167.24,1897.64 ccw(c1167.24,1997.64) 1237.95,1926.93 1295,1983.97 ccw(c1227.79,2051.18) R34.2@1322.83,2051.18
SYNC_EXT: ADC.1 R36.2 | length 981.2
  Top Layer w10: ADC.1@196.85,2401.57 214.81,2419.53 cw(c285.52,2348.82) 285.52,2448.82 789.29,2448.82 ccw(c789.29,2548.82) 860,2478.11 1006.14,2624.25 cw(c1076.85,2553.54) 1076.85,2653.54 R36.2@1086.61,2653.54
VCOM: C12.2 U6.55 U8.3 | length 482.8
  Top Layer w10: U6.55@1948.43,2792.5 1978.35,2822.41 cw(c2007.87,2792.89) 2007.87,2834.65 2027.56,2834.65 cw(c2027.56,2796.63) 2054.43,2823.52 2063.39,2814.56 ccw(c2122.05,2873.24) 2122.05,2790.27 2154.61,2790.27 cw(c2154.61,2692.91) C12.2@2251.97,2692.91 ccw(c2255.3,2696.24) 2255.3,2691.54 U8.3@2346.46,2691.54
VOCM: C32.2 C33.2 C34.2 C35.2 U1.2 U2.2 U3.2 U4.2 U8.2 U8.6 | length 4397.2
  Top Layer w10: U8.2@2346.46,2741.54 ccw(c2347.83,2741.54) 2347.83,2740.16 2440.94,2740.16 ; v1(2440.94,2814.96) 2440.94,2740.16 ; U8.6@2535.43,2691.54 2489.57,2691.54 cw(c2489.57,2740.16) 2440.94,2740.16 ; v1(2559.06,3031.5) v1(2559.06,3405.51)
  Top Layer w20: U1.2@496.06,3410.83 557.68,3410.83 v1(559.06,3409.45) 592.76,3375.75 cw(c522.05,3305.04) 622.05,3305.04 622.05,3255.23 ccw(c648.93,3255.23) C32.2@629.92,3236.22 ; U2.2@1283.46,3410.83 1345.08,3410.83 v1(1346.46,3409.45) 1380.16,3375.75 cw(c1309.45,3305.04) 1409.45,3305.04 C33.2@1409.45,3255.23 ; U3.2@2070.87,3410.83 2132.48,3410.83 v1(2133.86,3409.45) 2167.56,3375.75 cw(c2096.85,3305.04) 2196.85,3305.04 C34.2@2196.85,3255.23 ; U4.2@2858.27,3410.83 2919.88,3410.83 v1(2921.26,3409.45) 2954.96,3375.75 cw(c2884.25,3305.04) 2984.25,3305.04 C35.2@2984.25,3255.23
  Bottom Layer w10: v1(559.06,3409.45) 559.06,3383.05 1346.46,3383.05 ; v1(1346.46,3409.45) 1346.46,3383.05 ; v1(2133.86,3409.45) 2133.86,3383.05 ; v1(2440.94,2814.96) 2529.77,2903.78 ccw(c2459.06,2974.49) 2559.06,2974.49 v1(2559.06,3031.5) ; v1(2559.06,3405.51) 2559.06,3383.05 ; v1(2921.26,3409.45) 2921.26,3383.05 2559.06,3383.05 ; 1346.46,3383.05 2133.86,3383.05 ; 2133.86,3383.05 2559.06,3383.05
VREF: C10.2 U5.6 U6.56 W1.1 | length 1524.4
  Top Layer w10: U6.56@1934.51,2806.42 U6.56@1961.01,2832.92 ; 2027.56,2854.33 2011.81,2854.33 ccw(c2011.81,2783.38) 1965.15,2836.83 ; 2031.5,2862.2 2011.81,2862.2 ccw(c2011.81,2810.27) 1975.09,2846.99 U6.56@1961.68,2833.59 ; U6.56@1961.01,2832.92 cw(c2031.72,2762.2) U6.56@1961.65,2833.55 ; U6.56@1961.01,2832.92 U6.56@1961.64,2833.55 ; U6.56@1961.01,2832.92 U6.56@1961.68,2833.59 ; U6.56@1961.64,2833.55 cw(c2011.81,2783.38) 1965.15,2836.83 ; U6.56@1961.65,2833.55 cw(c2031.72,2762.2) 1965.15,2836.83 ; U6.56@1961.68,2833.59 cw(c2011.81,2783.38) 1965.15,2836.83
  Top Layer w18: 2027.56,2858.27 cw(c2027.56,2801.24) 2067.87,2841.57 ; 2067.88,2841.56 2078.74,2830.71 ccw(c2126.26,2878.23) 2126.26,2811.02 2231.33,2811.02 ccw(c2231.33,2851.35) 2259.84,2822.83 2279.53,2842.52 C10.2@2283.46,2842.52
  Top Layer w20: C10.2@2279.53,2854.33 2759.84,2854.33 cw(c2759.84,2814.96) 2799.21,2814.96 2799.21,2773.03 ccw(c2800.59,2773.03) U5.6@2800.59,2771.65 2800.59,2678.54 cw(c2799.21,2678.54) v1(2799.21,2677.17)
  Bottom Layer w20: v1(2799.21,2677.17) ccw(c2817.32,2677.17) 2817.32,2659.06 W1.1@3149.61,2659.06
pads on no net: Power_IN.4 U5.1 U5.3 U5.7 U5.8 U6.13 U6.14 U6.15 U6.16 U6.45 U6.46 U6.47 U6.48 U6.49 U6.50 U6.51 U6.52 U8.1 U8.5 U8.8

## Polygon pours and split planes (outlines as drawn)
GND on Top Layer "Bottom Layer-No Net" (solid, remove dead copper, pour order 7): 19.69,2814.96 24.72,2820 60,2820 1337,2820 1382,2865 1391.02,2874.02 1397.64,2874.02 1398.02,2874.02 1403,2879 1503,2879 1591.89,2879 1604.13,2866.76 2065.2,2405.69 cw(c1994.49,2334.98) 2094.49,2334.98 2094.49,2324 2094.49,2308 2138,2308 2598.43,2308 2598.43,2303.15 2598.43,2303 2603,2303 2603,2278 2603,1718 2629,1718 3523.62,1718 3523.62,1712.6 3523.62,1713 3528,1713 3528,1463 3523.62,1458.62 3523.62,1338.58 3518,1296 3493,1252 3461,1222 3409,1200 3390,1196 157,1196 98,1212 44,1257 21,1314 15,1336 15,2815
GND on Top Layer "Bottom Layer-No Net" (solid, remove dead copper, pour order 8): 3519.68,2204.72 2755.91,2204.72 2755.91,2377 2585,2377 2116.84,2377 2116.84,2381.89 1938,2560.73 1709.73,2789 1620.84,2877.89 1602,2891 1582.68,2893.7 19.69,2893.7 19.69,3779.53 35,3850 102,3909 157.48,3917.32 3385.83,3917.32 3459,3901 3516,3835 3523.62,3779 3523.62,2210
RGND on Top Layer "Bottom Layer-No Net" (solid, remove dead copper, pour order 9): 2763.78,2897.64 2763.78,2854.33 2641.73,2854.33 2279.53,2854.33 2279.53,2877.95 2233.91,2877.95 ccw(c2233.91,2864.51) 2224.41,2874.02 2218.27,2867.87 cw(c2147.55,2938.58) 2147.55,2838.58 2141.73,2838.58 2129.1,2838.58 cw(c2129.1,2908.63) 2079.57,2859.1 ccw(c2032.35,2811.87) 2032.35,2878.66 2000,2878.66 1997.09,2878.66 ccw(c1997.09,2849.36) 1976.38,2870.08 1975.22,2871.23 cw(c1981.95,2877.95) 1972.44,2877.95 cw(c2014.4,2843.87) 2008.83,2897.64 2366.14,2897.64
RGND on Top Layer "Bottom Layer-No Net" (solid, remove dead copper, pour order 6): 3267.72,2578.74 3267.72,2421.26 3267.72,2381.89 cw(c3228.35,2381.89) 3228.35,2342.52 2838.58,2342.52 cw(c2838.58,2381.89) 2799.21,2381.89 2799.21,2511.81 ccw(c2787.4,2511.81) 2787.4,2523.62 2677.17,2523.62 cw(c2677.17,2562.99) 2637.8,2562.99 2637.8,2897.64 3228.35,2897.64 cw(c3228.35,2858.27) 3267.72,2858.27
GND on Bottom Layer "Bottom Layer-No Net" (solid, remove dead copper, pour order 10): 0,1181.1 0,3937.01 3543.31,3937.01 3543.31,1181.1

## Keep-outs
Keep-Out Layer:
  lines w8.66: 0,1338.58 0,3779.53 ; 157.48,1181.1 3389.2,1181.1 ; 157.48,3937.01 3385.83,3937.01 ; 3543.31,1338.58 3543.31,3782.9
  lines w10: 0,1338.58 ccw(c157.48,1338.58) 157.48,1181.1 ; 0,3779.53 cw(c157.48,3779.53) 157.48,3937.01 ; 3389.2,1181.1 ccw(c3389.2,1335.21) 3543.31,1335.21 ; 3389.2,3937.01 cw(c3389.2,3782.9) 3543.31,3782.9

## Other copper
Top Layer:
  rectangle net +1.8V: 1476.38,1803.15 1484.25,1929.13
  rectangle net +1.8V: 1456.69,1803.15 1476.38,1948.82
  rectangle net +1.8V: 1435.04,1803.15 1456.69,1968.5
  rectangle net +1.8V: 1472.44,1736.22 1494.09,1807.09
  rectangle net RGND: 2169.29,2846.46 2192.91,2893.7
  rectangle net RGND: 2177.01,2874.02 2228.35,2885.98
Bottom Layer:
  pour cut-out: 2606.3,2307.09 2606.3,1720.47 3527.56,1720.47 3527.56,2196.85 2748.03,2196.85 2748.03,2307.09
  pour cut-out: 2106.3,2374.02 2106.3,2311.02 2748.03,2307.09 2748.03,2374.02
  pour cut-out: 15.75,2889.76 15.75,2818.9 1338.58,2818.9 1338.58,2889.76

## Silkscreen, mask and mechanical layers (free items; w line width, h text height)
Bottom Solder:
  rectangle: 1377.95,2854.33 1653.54,3070.87
  rectangle: 1377.95,2381.89 2076.77,2854.33
  lines w50: 1377.95,2381.89 1377.95,3070.87 1653.54,3070.87 1653.54,2904.33 ccw(c1703.54,2904.33) 1703.54,2854.33 2047.24,2854.33 cw(c2047.24,2824.8) 2076.77,2824.8 2076.77,2381.89 1377.95,2381.89

## Text inside footprints (layer, text, board x,y; h text height)
ADC: Top Overlay "2" at 272.85,2533.57 h40 r270; Top Overlay "1" at 173.85,2516.57 h40 r270